# Altium PCB sheet_switch.PcbDoc
Units mm, origin at the board's own origin, x right, y up, seen from the top; angles counter-clockwise.
Board outline 152.4 x 101.6 mm, 2 copper layers (Top Layer, Bottom Layer); 20 components, 15 nets, 54 pads, 0 vias.
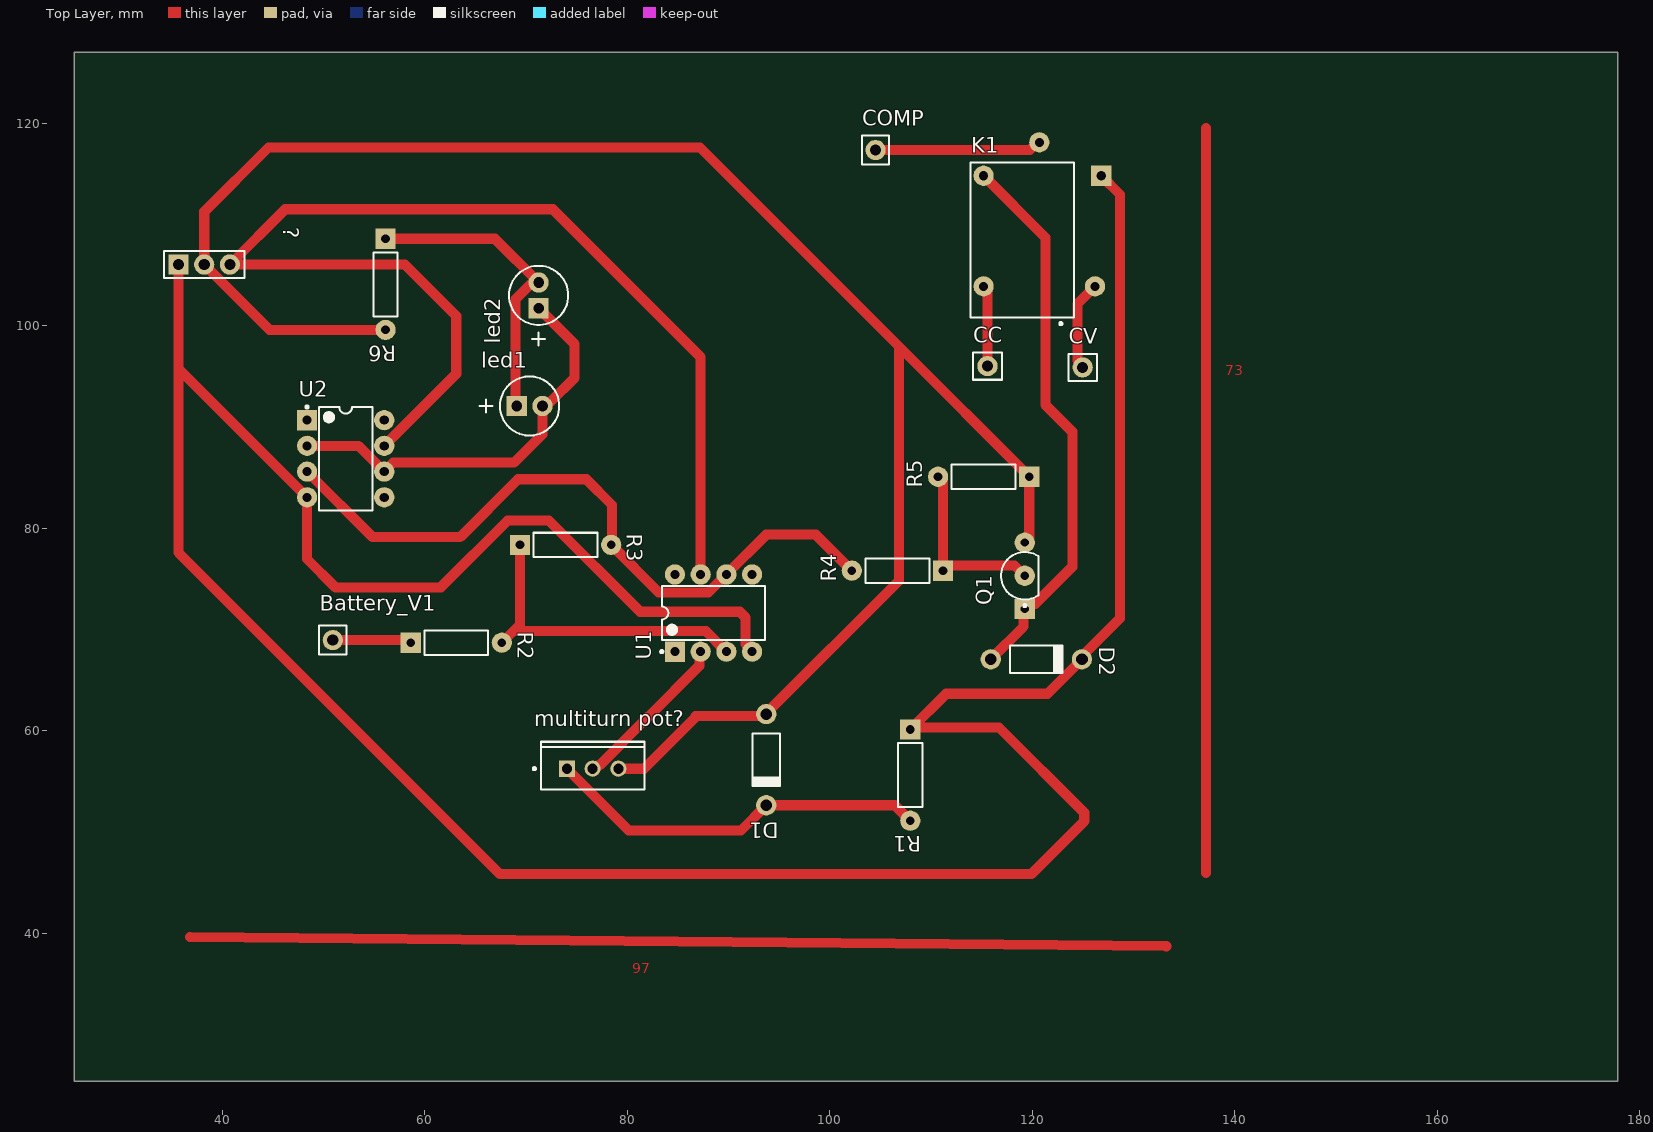
[diagram p0: Top Layer view]
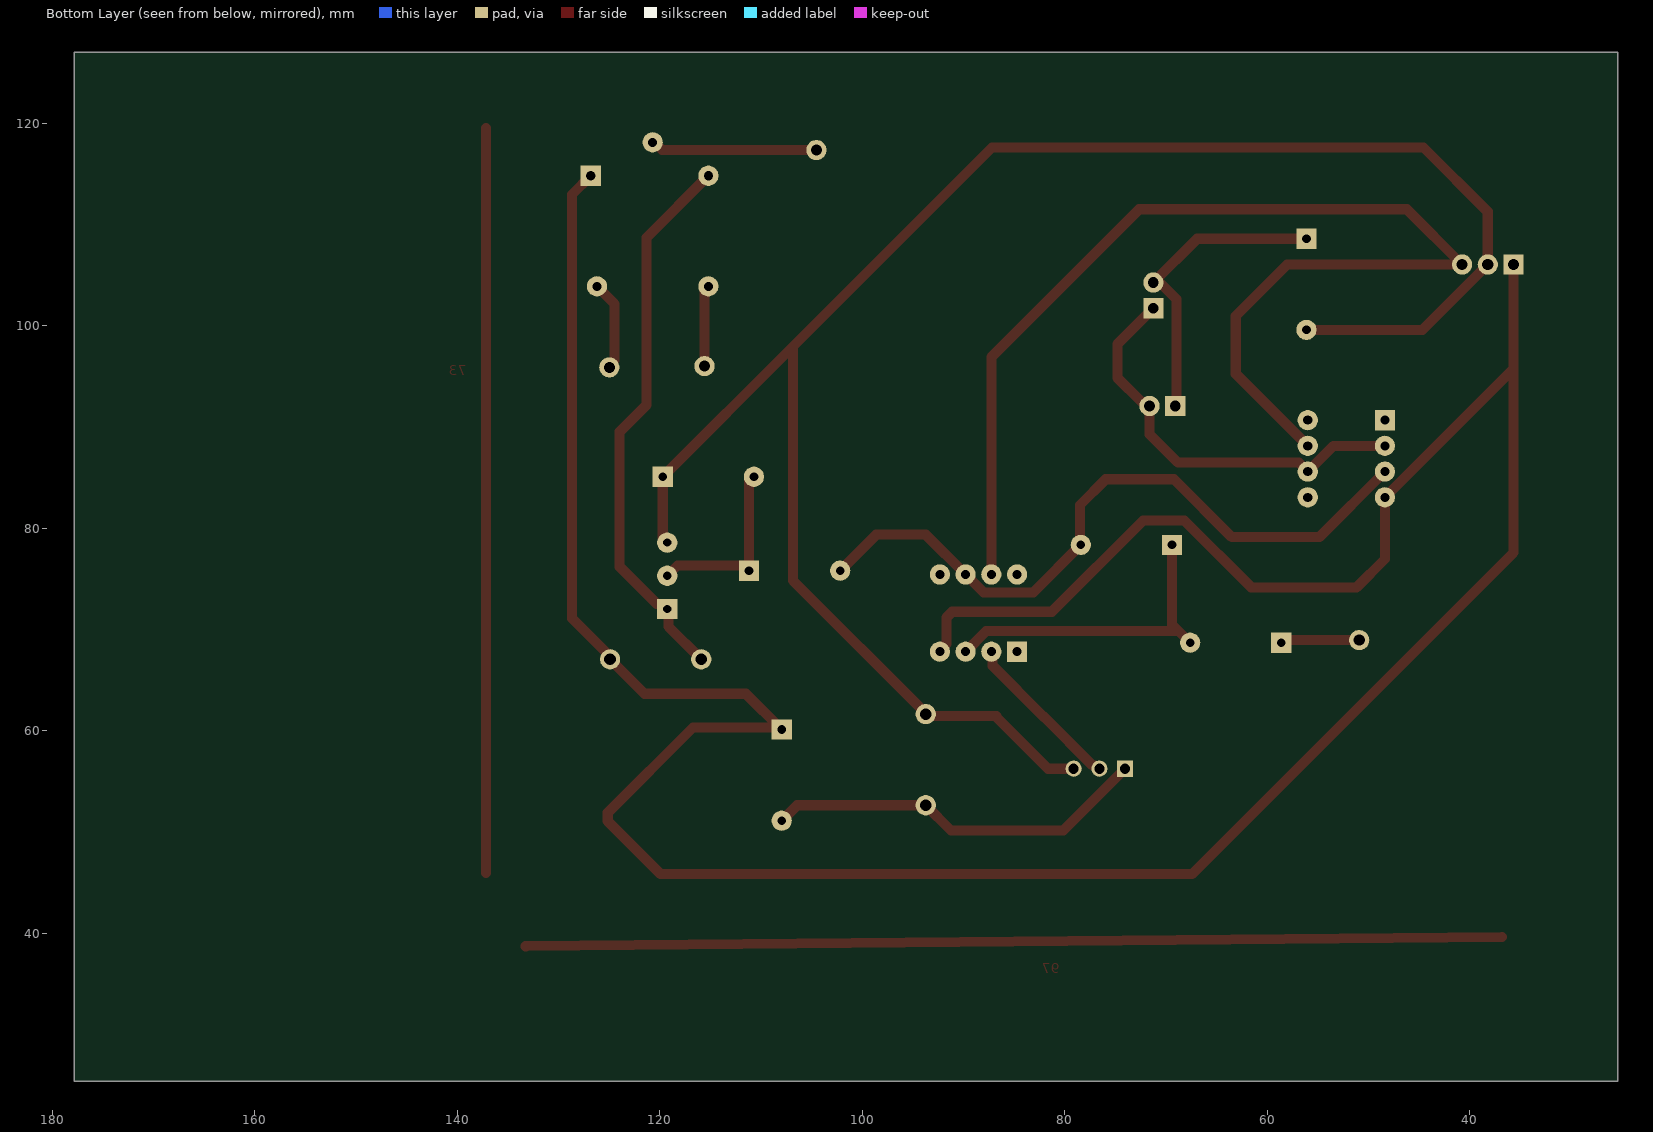
[diagram p1: Bottom Layer view, seen from below]

## Layer stack, top to bottom
Top Solder: solder mask 0.0102, Solder Resist, Dk 3.5
Top Layer: signal copper 0.0356
Dielectric 1: dielectric 0.32, FR-4, Dk 4.8
Bottom Layer: signal copper 0.0356
Bottom Solder: solder mask 0.0102, Solder Resist, Dk 3.5

## Board outline
25.4,25.4 177.8,25.4 177.8,127 25.4,127

## Design rules (kind name [scope] priority, off if disabled: settings)
Clearance [All] p1: gap=0.254 ignorepadtopadclearanceinfootprint=FALSE except(0: Arc-Hole Track-Hole SMDPad-Hole THPad-Hole Via-Hole Fill-Hole Poly-Hole Region-Hole Text-Hole)
PolygonConnect [All] p1: connectstyle=Relief reliefconductorwidth=0.254 reliefentries=4 polygonreliefangle="90 Angle" airgapwidth=0.254
RoutingVias [All] p1: holewidth=0.711 width=1.27 viastyle="Through Hole" minholewidth=0.711 minwidth=1.27 maxholewidth=0.711 maxwidth=1.27
SolderMaskExpansion [All] p1: expansion=0.102 istentingtop=FALSE
Width [All] p1: maxlimit=1 minlimit=0.254 preferedwidth=0.7
30 further rules are at their usual default settings.

## Components (designator, comment, footprint, x,y, rotation, side; value= is the part's Value field where it differs from the comment)
? "61300311121" 61300311121 38.227,106.045 r0 top
Battery_V1 "61300111121" 61300111121 50.927,68.961 r90 top
CC "61300111121" 61300111121 115.57,96.012 r0 top
COMP "61300111121" 61300111121 104.521,117.348 r90 top
CV "61300111121" 61300111121 124.968,95.885 r0 top
D1 "1N4728A" FAIR-DO-41-2_V 93.726,57.15 r270 top
D2 "1N4728A" FAIR-DO-41-2_V 120.396,67.056 r0 top
K1 "DS1E-S-DC24V" FP-DS1E-MFG 118.999,108.458 r90 top
led1 "HLMP-3301" AVAG-HLMP-3301-2 69.088,92.075 r0 top
led2 "HLMP-3301" AVAG-HLMP-3301-2 71.247,101.727 r90 top
"multiturn pot?" "" FAIR-TO-220-3 76.581,56.261 r90 top
Q1 "BC547B" ONSC-TO-92-3-29-11 119.253,75.311 r90 top
R1 "470" RESA60-630X240 107.95,55.626 r270 top
R2 "1K" RESA60-630X240 63.119,68.707 r0 top
R3 "47k" RESA60-630X240 73.914,78.359 r0 top
R4 "1K" RESA60-630X240 106.68,75.819 r180 top
R5 "10K" RESA60-630X240 115.189,85.09 r180 top
R6 "330" RESA60-630X240 56.134,104.085 r270 top
U1 "LM741CN/NOPB" P0008A 88.519,71.628 r90 top
U2 "LM741CN/NOPB" P0008A 52.197,86.868 r0 top

## Footprints (in the part's own frame and the unit in brackets; to place one, negate y for a bottom-side part, rotate by r counter-clockwise, add the part's x,y. Pads: shape width x height; smd on the part's side, far side on the other; paste and mask are expansions set on the pad)
61300111121 [mm] "Pin Header, pitch 2.54 mm, THT, Vertical, single row, 1p"
  round 2 hole 1.1: 1(0,0)
  silkscreen extent -1.42,-1.34 1.42,1.34, body extent -1.27,-1.27 1.27,1.27, height 8.57
61300311121 [mm] "Pin Header, pitch 2.54 mm, THT, Vertical, single row, 3p"
  rect 2x2 hole 1.1: 1(-2.54,0)
  round 2 hole 1.1: 2(0,0) 3(2.54,0)
  silkscreen extent -3.96,-1.34 3.96,1.34, body extent -3.81,-1.27 3.81,1.27, height 8.57
AVAG-HLMP-3301-2 [mm] "THD, 2-Leads, Body Dia 5.85mm"
  rect 2x2 hole 1.05: 1(0,0)
  round 2 hole 1.05: 2(2.54,0)
  silkscreen extent -3.68,-2.92 4.19,2.92
FAIR-DO-41-2_V [mm] "2-Leads, Axial leaded, Body 2.72x5.2mm, Pin Spacing 9mm"
  round 2 hole 1.15: 1(-4.5,0) 2(4.5,0)
  silkscreen extent -2.6,-1.36 2.6,1.36, body extent -4.93,-1.36 4.93,1.36, height 2.71
FAIR-TO-220-3 [mm] "FM, 3-Leads, Body 10.2x4.7mm, Pitch 2.54mm"
  rect 1.6x1.6 hole 1: 1(0,2.54)
  round 1.6 hole 1: 2(0,0) 3(0,-2.54)
  silkscreen extent -2.04,-5.1 2.66,5.87, body extent -2.04,-5.1 2.66,5.1, height 18.95
FP-DS1E-MFG [mm]
  rect 2x2 hole 0.9 paste-1000 mask+0: 1(6.35,-7.81)
  round 2 hole 0.9 paste-1000 mask+0: 7(9.65,-1.69) 10(-4.57,3.81) 12(-4.57,-7.19) q(6.35,3.81)
  silkscreen extent -8.37,-5.1 7.65,5.1, body extent -7.75,-5.2 7.75,5.2, height 0.25
ONSC-TO-92-3-29-11 [mm] "TO, 3-Leads, Body Dia 4.7mm, Pitch 1.27mm"
  rect 2x2 hole 0.8: 1(-3.27,0)
  round 2 hole 0.8: 2(0,0) 3(3.27,0)
  silkscreen extent -3.07,-1.34 2.35,2.35, body extent -2.35,-1.33 2.36,2.36, height 7.87
P0008A [mm] "DIP, 8-Leads, Body 10.15x6.6mm, Pitch 2.54mm"
  rect 2x2 hole 0.9: 1(-3.81,3.81)
  round 2 hole 0.9: 2(-3.81,1.27) 3(-3.81,-1.27) 4(-3.81,-3.81) 5(3.81,-3.81) 6(3.81,-1.27) 7(3.81,1.27) 8(3.81,3.81)
  silkscreen extent -3.93,-5.1 2.65,5.23, body extent -3.95,-5.07 3.95,5.07, height 5.08
RESA60-630X240 [mm] "Axial Resistor, 2-Leads, Dia 2.4mm, Body Length 6.3mm"
  rect 2x2 hole 0.85: 1(-4.5,0)
  round 2 hole 0.85: 2(4.5,0)
  silkscreen extent -3.15,-1.2 3.15,1.2, body extent -3.15,-1.2 3.15,1.2, height 2.4

## Part data
?: library part CMP-1502-01062-1, "THT Vertical Pin Header WR-PHD, Pitch 2.54 mm, Single Row, 3 pins", Contact Resistance=20mOhm, Manufacturer="Wurth Elektronik", Operating Temperature=-40to105degC, Rated Current=3A, Withstanding Voltage=500VAC, Working Voltage=250VAC, Datasheet URL=https://katalog.we-online.de/em/datasheet/6130xx11121.pdf, Gender=Male, Manufacturer URL=http://www.we-online.de, Mounting Technology=THT, Orientation=Vertical, Package Reference=61300311121, Packaging=Bag, Part Number=61300311121, Pin Number=3, Pitch=2.54mm, Publisher=WurthElektronik, Row Number=Single
Battery_V1 CC COMP CV: library part CMP-1502-01058-1, "THT Vertical Pin Header WR-PHD, Pitch 2.54 mm, Single Row, 1 pins", Contact Resistance=20mOhm, Manufacturer="Wurth Elektronik", Operating Temperature=-40to105degC, Rated Current=3A, Withstanding Voltage=500VAC, Working Voltage=250VAC, Datasheet URL=https://katalog.we-online.de/em/datasheet/6130xx11121.pdf, Gender=Male, Manufacturer URL=http://www.we-online.de, Mounting Technology=THT, Orientation=Vertical, Package Reference=61300111121, Packaging=Bag, Part Number=61300111121, Pin Number=1, Pitch=2.54mm, Publisher=WurthElektronik, Row Number=Single
D1 D2: library part CMP-0892-00028-1, "Zener Diode, 3.3V, 1W, 5%, -65 to 200 degC, 2-Pin DO-41, Body 2.72 x 5.2 mm, RoHS", Manufacturer="Fairchild Semiconductor", Operating and Storage Temperature Range="-65 to 200 degC", Test Current IZ (mA)=76, Tolerance=5%, ComponentLink1Description="Manufacturer URL", ComponentLink1URL=http://www.fairchildsemi.com/, ComponentLink2Description=Datasheet, ComponentLink2URL=http://www.fairchildsemi.com/ds/1N/1N4744A.pdf, ComponentLink3Description="Package Specification", ComponentLink3URL=http://www.fairchildsemi.com/dwg/DO/DO41A.pdf, DatasheetVersion="Rev. H3", IR (uA)=100, Mounting Technology="Through Hole", PackageDescription="2-Pin Axial leaded, Body 2.72 x 5.2 mm, Lead Spread 25.4 mm", PackageReference=DO-41-2, PackageVersion="Rev. 2", PartNumber=1N4728A, PD (W)=1, RoHS=TRUE, VZ (Max.) (V)=3.465, VZ (Min.) (V)=3.135, ZZ (Max) (ohm)=10
K1: library part CMP-05607-000039-1, "RELAY GEN PURPOSE SPDT 2A 24VDC", Case/Package=DIP, Coil Current=8.3mA, Coil Power=200mW, Coil Resistance=2.88kR, Coil Voltage (DC)=24V, Contact Current Rating=3A, Current Rating=2A, Max Operating Temperature=70°C, Max Voltage Rating (AC)=250V, Max Voltage Rating (DC)=220V, Min Operating Temperature=-40°C, Package Quantity=50, Power Rating=60W, Approvals=UL, Coil Type=Non-Latching, Contact Material=Gold, Depth=9.9mm, Height=9.9mm, Lead Free="Lead Free", Length=15mm, Life (Hours)=500000Hour, Max Current Rating=3A, Mount="Through Hole", Number of Pins=5, Operate Time=10ms, Packaging=Rail/Tube, Power Consumption=200mW, Radiation Hardening=No, REACH SVHC="No SVHC", Relay Type="General Purpose", Release Time=5ms, Rise Time=3ms, RoHS Compliant=Yes, Series=DS, Termination="PC Pin", Throw Configuration=SPDT, Voltage Rating (AC)=250V, Voltage Rating (DC)=220V, Weight=3g, Width=9.9mm
led1 led2: library part CMP-2000-06411-1, "T-1 3/4 (5 mm) Diffused LED Lamp, 1.9 V, -40 to 100 degC, 2-Pin THD, RoHS, Bulk", Emitting Color=Red, Forward Current=25mA, Forward Voltage=2.4V, Manufacturer=Avago, Operating Temp Range=-40Cto100C, Operating Temperature Classification=Industrial, Package Description="2-Pin Through Hole LED, Dia 5.85 mm", Package Type=T-13/4, Power Dissipation=85W, Reverse Voltage=5V, Test Current (It)=10mA, Chip Material=GaP, Datasheet URL=http://www.avagotech.com/docs/AV02-1558EN, Datasheet Version=03/2015, DELETED=Compliant, Dominant Wave Length=626nm, High Brightness=No, Lens Dimensions=5.08x5.08x8.3mm, Lens Type=ColoredDiffused, Lum Intensity=5.4mcd, Luminous Intensity=5.4mcd, Main Category=StandardLED, Manufacturer URL=http://www.avagotech.com/, Mounting=ThroughHole, Mounting Technology=ThroughHole, Number of  Elements=1, Package Reference=HLMP-3301, Packaging=TapeandReel, Peak Wavelength=635nm, Pin Count=2, Product Depth (mm)=6.1mm, Product Height (mm)=9.19mm, Product Length (mm)=6.1mm, Rad Hardened=No, Shape Type=Circular, Type=Uni-Color, Viewing Angle=60deg
"multiturn pot?": library part CMP-2000-04938-1, "Positive Voltage Regulator, 5 V, 1 A, -40 to 125 degC, 3-Pin TO-220, RoHS, Tube", Manufacturer=FairchildSemiconductor, Maximum Input Voltage=35V, Maximum Output Current=2.2(Typ)A, Maximum Quiescent Current=8mA, Operating Temperature=-40to125degC, Output Voltage=5V, Package=3TO-220AB, Package Description="3-Pin Through Hole Device, Body 10 x 4.5 mm, Pitch 2.54 mm", Package Reference=TO-220, Typical Dropout Voltage @ Current=2@1AV, Accuracy=±4%, Category=LinearRegulator, Datasheet URL=https://datasheet.ciiva.com/26904/lm7805ct-26904988.pdf, Datasheet Version=Aug-12, Line Regulation=100mV, Load Regulation=100mV, Manufacturer URL=https://www.fairchildsemi.com/, Mounting=ThroughHole, Number of Outputs=1, Output Type=Fixed, Package URL=https://www.fairchildsemi.com/package-drawings/TO/TO220B03.pdf, Packaging=Rail/Tube, Polarity=Positive, Rad Hard=No, Type=Linear
Q1: library part CMP-1048-01467-1, "Amplifier Transistor, NPN Silicon, 3-Pin TO-92, Bulk Box", Manufacturer="On Semiconductor", ComponentLink1Description="Manufacturer URL", ComponentLink1URL=http://www.onsemi.com/, ComponentLink2Description=Datasheet, ComponentLink2URL=http://www.onsemi.com/pub_link/Collateral/BC546-D.PDF, ComponentLink3Description="Package Specification", ComponentLink3URL=http://www.onsemi.cn/pub_link/Collateral/2N6426-D.PDF, DatasheetVersion="Rev. 7", fT Min (MHz)=150, IC Continuous (A)=0.1, Mounting Technology="Through Hole", PackageDescription="3-Pin Transistor Outline, Body 4.825 x 3.685 mm, Pitch 1.27 mm", PackageReference=TO-92-3-29-11_AM_SL, PackageVersion="Rev. AM", Packing="Bulk Box", PartNumber=BC547B, Polarity=NPN, RoHS=FALSE
R1 R2 R3 R4 R5 R6: library part CMP-1659-00075-1, "Axial Resistor, 1 KOhm, +/- 1%, 250 mW, -55 to 155 degC, 2-Pin THD, RoHS, Bulk", Case\Package=Axial, Max Operating Temperature="155 degC", Min Operating Temperature="-55 degC", Package Quantity=200, Power Rating="250 mW", Resistance="10 kohm", Tolerance=1%, Voltage Rating="250 V", ComponentLink1Description="Manufacturer URL", ComponentLink1URL=http://www.yageo.com/, ComponentLink2Description=Datasheet, ComponentLink2URL=http://www.yageo.com/documents/recent/Yageo%20LR_MFR_2013.pdf, DatasheetVersion=Apr-13, Length="0.248 inch", PackageDescription="2-Pin Axial Lead, Dia 2.4 mm, Body Length 6.3 mm", PackageReference=MFR-25, Packaging=Bulk, RoHSCompliant=true
U1 U2: library part CMP-0055-00162-3, "Operational Amplifier, 8-pin MDIP, Pb-Free", Manufacturer="Texas Instruments", Package Reference=P0008A, PackageTopMarking=NSUZXYTTE#*LM*741CN, PowerWise=N, Code_JEDEC=MS-001-BA, ComponentLink1Description="Datasheet URL", ComponentLink1URL=http://www.ti.com/general/docs/lit/getliterature.tsp?genericPartNumber=LM741&fileType=pdf, CompType=Amplifiers, PackageDescription="MDIP, .365 x .250 x .130in, 8 Lead, .100in Pitch", PinCount=8, RoHS=Y

## Nets (pads, with @x,y where several pads share a name; then routed paths per layer and width w, separated by ;. In a path a pad name is that pad's centre, name@x,y a point inside that pad or via, vN(x,y) a via of type N, cw(c..) or ccw(c..) an arc to the next point about the centre after c; other vN are vias at no path point)
+15: ?.1 D2.2 K1.1 R1.1 U1.4 U2.4 | length 301.7
  Top Layer w1: ?.1 35.687,95.758 ; U1.4 92.329,67.953 91.694,68.588 91.694,71.169 91.108,71.755 81.28,71.755 72.263,80.772 68.199,80.772 61.595,74.168 51.181,74.168 48.387,76.962 U2.4 35.687,95.758 ; R1.1 111.487,63.663 121.503,63.663 124.587,66.747 D2.2@124.587,66.929 ; R1.1@108.711,60.325 116.713,60.325 125.125,51.913 125.125,51.084 119.888,45.847 67.437,45.847 35.687,77.597 35.687,95.758 ; D2.2@124.968,67.056 D2.2@124.968,67.128 ; D2.2@125.222,67.691 128.651,71.12 128.651,112.966 K1.1
-15: ?.3 U1.7 U2.7 | length 116.5
  Top Layer w1: U2.7 63.119,95.25 63.119,100.965 58.039,106.045 ?.3 46.228,111.506 72.644,111.506 87.249,96.901 U1.7
CC: CC.1 K1.10 | length 8.2
  Top Layer w1: K1.10@115.189,104.013 K1.10 115.189,103.699 115.57,103.318 CC.1
COMP: COMP.1 K1.7 | length 16.4
  Top Layer w1: COMP.1 119.74,117.348 120.375,117.983 K1.7@120.65,117.983
CV: CV.1 K1.12 | length 8.9
  Top Layer w1: CV.1 124.968,96.047 124.46,96.555 124.46,102.159 K1.12
GND: "multiturn pot?.3" ?.2 D1.1 Q1.3 R5.1 R6.2 | length 188.4
  Top Layer w1: R6.2 44.687,99.585 ?.2 38.227,111.252 44.577,117.602 87.177,117.602 106.835,97.945 106.835,74.831 D1.1@93.69,61.686 ; 79.121,56.261 81.661,56.261 86.741,61.341 ; 86.741,61.468 93.544,61.468 D1.1 ; 106.934,97.845 R5.1 119.689,79.112 119.253,78.676 Q1.3
NetBattery_V1_1: Battery_V1.1 R2.1 | length 7.7
  Top Layer w1: Battery_V1.1 R2.1@58.674,68.961
NetD1_2: "multiturn pot?.1" D1.2 R1.2 | length 38
  Top Layer w1: 74.041,56.134 74.168,56.134 80.137,50.165 91.241,50.165 D1.2 106.426,52.65 R1.2
NetD2_1: D2.1 Q1.1 | length 55.3
  Top Layer w1: 115.189,114.808 121.285,108.712 121.285,92.202 123.952,89.535 123.952,76.2 120.293,72.541 119.753,72.541 Q1.1 ; D2.1@115.796,67.156 D2.1 119.126,70.286 Q1.1@119.126,72.263
Netled1_1: led1.1 led2.2 R6.1 | length 29.7
  Top Layer w1: R6.1 66.929,108.585 led2.2 71.142,104.162 70.507,104.162 68.961,102.616 led1.1@68.961,92.837
Netled1_2: led1.2 led2.1 U2.2 U2.6 | length 41
  Top Layer w1: U2.2 53.467,88.138 U2.6 56.896,86.487 68.834,86.487 71.628,89.281 led1.2 ; led2.1 74.803,98.171 74.803,94.869 72.409,92.475 72.258,92.475 led1.2@71.858,92.075
"Netmultiturn pot?_2": "multiturn pot?.2" U1.2 | length 16.2
  Top Layer w1: 76.581,56.261 76.743,56.261 77.043,56.561 77.223,56.561 82.058,61.396 82.097,61.396 87.116,66.415 87.116,67.685 U1.2
NetQ1_2: Q1.2 R4.1 R5.2 | length 18.2
  Top Layer w1: R5.2 111.18,84.599 R4.1 111.688,76.327 118.237,76.327 Q1.2
NetR2_2: R2.2 R3.1 U1.3 | length 32.3
  Top Layer w1: R2.2 68.762,69.85 ; R3.1 69.414,70.502 68.762,69.85 ; U1.3 87.757,69.85 68.762,69.85
NetR3_2: R3.2 R4.2 U1.6 U2.3 | length 69.2
  Top Layer w1: U2.3 54.864,79.121 63.5,79.121 69.215,84.836 75.946,84.836 78.486,82.296 R3.2@78.486,78.867 ; R3.2 83.113,73.66 88.011,73.66 U1.6 93.726,79.375 98.624,79.375 R4.2
pads on no net: K1.q U1.1 U1.5 U1.8 U2.1 U2.5 U2.8
copper on no net: | length 169.9
  Top Layer w1: 36.83,39.624 133.223,38.735 ; 137.16,45.974 137.16,119.507

## Other copper
Top Layer:
  text "73" at 139.065,95.123 h1
  text "97" at 80.518,36.068 h1